# Altium PCB Moisture.PcbDoc
Units mm, origin at the board's own origin, x right, y up, seen from the top; angles counter-clockwise.
Board outline 23.94 x 64.68 mm, 2 copper layers (Top Layer, Bottom Layer); 8 components, 6 nets, 16 pads, 64 vias.
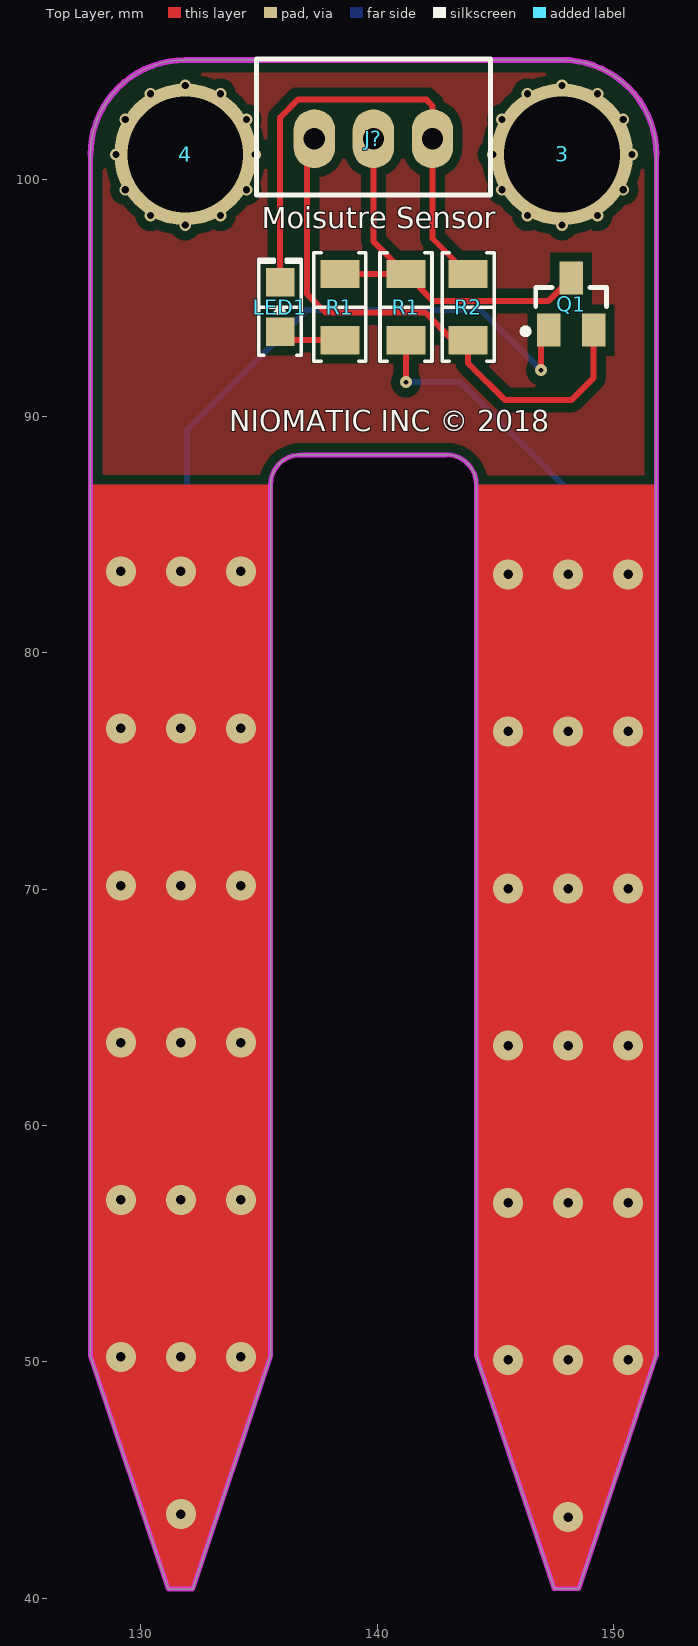
[diagram p0: Top Layer view]
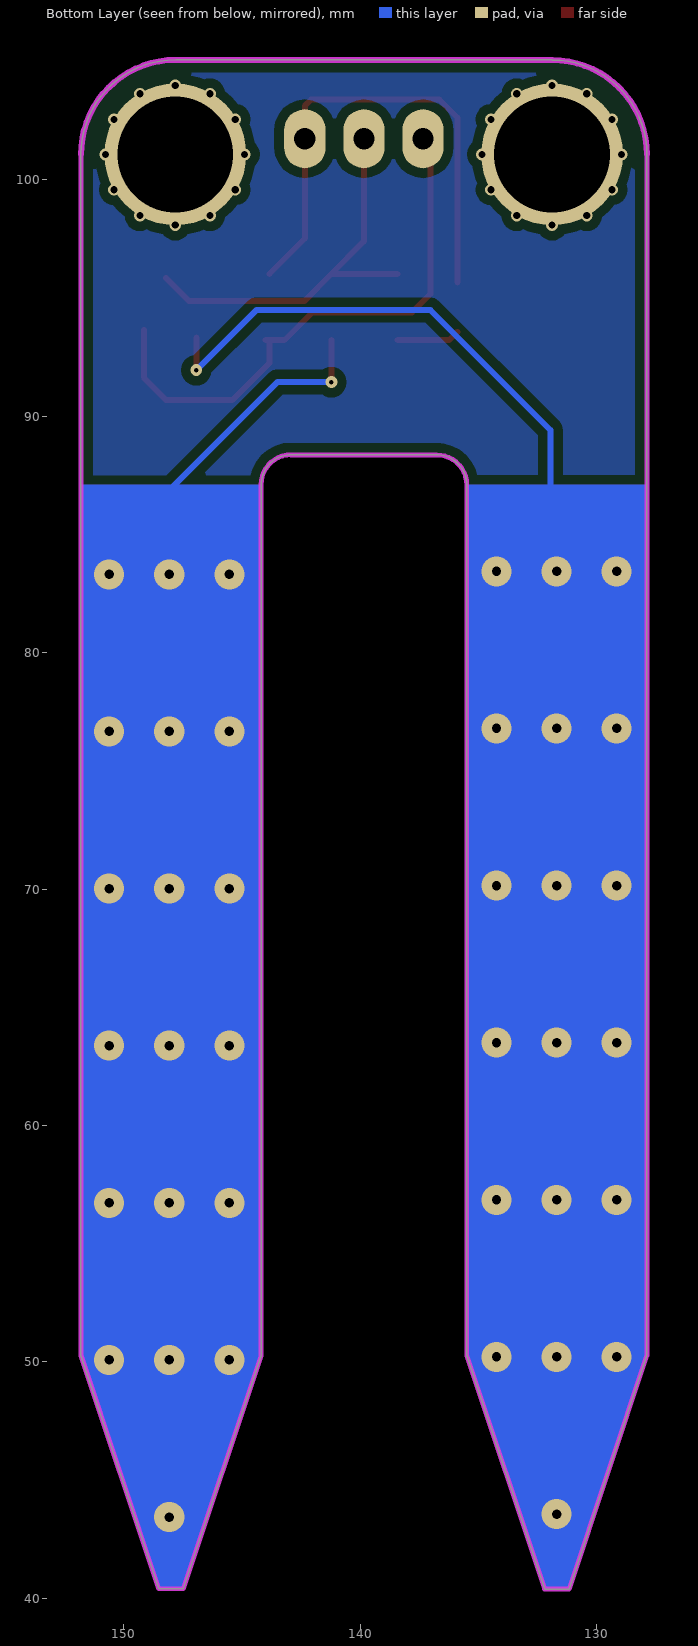
[diagram p1: Bottom Layer view, seen from below]
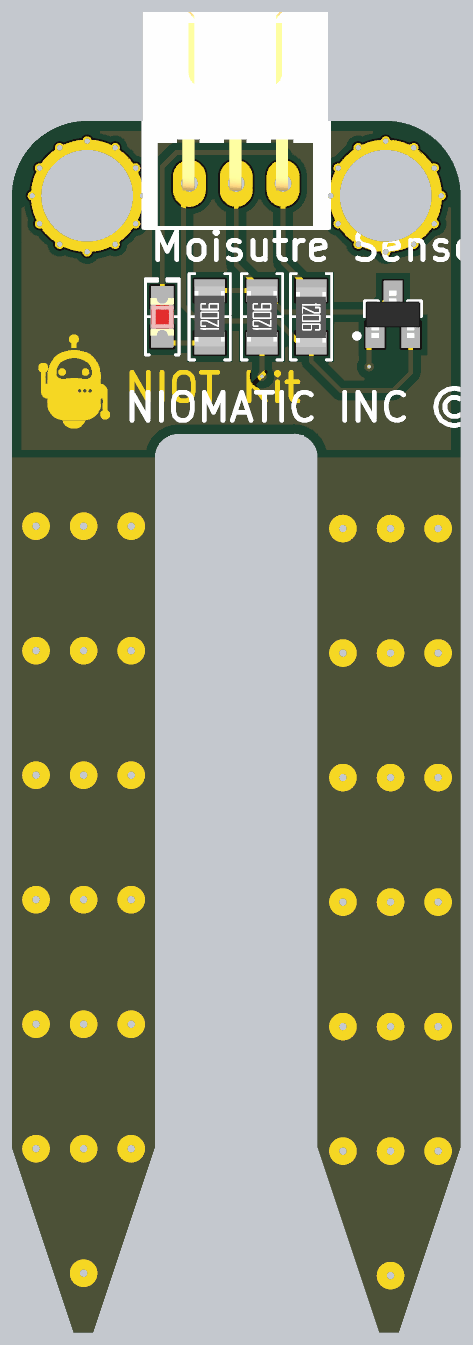
[diagram p2: 3D render of the assembled board from above, using the file's embedded part models]

## Layer stack, top to bottom
Top Solder: solder mask 0.0102, Solder Resist, Dk 3.5
Top Layer: signal copper 0.0356
Dielectric 1: dielectric 0.32, FR-4, Dk 4.8
Bottom Layer: signal copper 0.0356
Bottom Solder: solder mask 0.0102, Solder Resist, Dk 3.5

## Board outline
131.168,40.39 127.876,50.265 127.876,101.065 cw(c131.876,101.065) 131.876,105.065 131.876,105.074 147.816,105.074 cw(c147.816,101.074) 151.816,101.074 151.816,50.274 148.525,40.399 147.488,40.399 144.196,50.274 144.196,87.104 ccw(c142.926,87.104) 142.926,88.374 142.926,88.365 136.766,88.365 ccw(c136.766,87.095) 135.496,87.095 135.496,50.265 132.205,40.39

## Design rules (kind name [scope] priority, off if disabled: settings)
Clearance [All] p1: gap=0.4 ignorepadtopadclearanceinfootprint=FALSE
PolygonConnect [All] p1: connectstyle=Relief reliefconductorwidth=0.254 reliefentries=4 polygonreliefangle="90 Angle" airgapwidth=0.254
RoomDefinition Moisture [InComponentClass('Moisture')] p1: confinementstyle=ConfineIn formatcopy=TRUE lockcomponents=FALSE outline 0,0 50.8,0 50.8,25.4 0,25.4
RoutingVias [All] p1: holewidth=0.711 width=1.27 viastyle="Through Hole" minholewidth=0.711 minwidth=1.27 maxholewidth=0.711 maxwidth=1.27
SolderMaskExpansion [All] p1: expansion=0.102
Width [All] p1: maxlimit=0.254 minlimit=0.254 preferedwidth=0.254
30 further rules are at their usual default settings.

## Classes and differential pairs
component class Moisture: J? LED1 Q1 R1 R2

## Components (designator, comment, footprint, x,y, rotation, side; value= is the part's Value field where it differs from the comment)
3 "Lego" "Lego Hole" 147.826,101.075 r90 top
4 "Lego" "Lego Hole" 131.886,101.075 r90 top
J? "Header" "JST XH B3B-XH-A - RIGHT" 139.846,101.736 r180 top
LED1 "RED" "LED 0805/2012 RED" 135.898,94.615 r90 top value=Green
Q1 "2N3904" SOT23 148.209,94.742 r90 top
R1 "1K" "RES 1206/3216" 138.43,94.615 r90 top
R1 "100R" "RES 1206/3216" 141.224,94.615 r90 top value=1K
R2 "10K" "RES 1206/3216" 143.848,94.615 r270 top value=1K

## Footprints (in the part's own frame and the unit in brackets; to place one, negate y for a bottom-side part, rotate by r counter-clockwise, add the part's x,y. Pads: shape width x height; smd on the part's side, far side on the other; paste and mask are expansions set on the pad)
"JST XH B3B-XH-A - RIGHT" [mm]
  oval 1.75x2.5 hole 0.9: 1(-2.5,0) 2(0,0) 3(2.5,0)
  silkscreen extent -4.95,-3.38 4.95,2.38, body extent -4.9,-9.15 5,2.35, height 6.1
"LED 0805/2012 RED" [mm] "Chip Diode, 2-Leads, Body 2.00x1.25mm, IPC Medium Density"
  rect 1.2x1.2 smd: 1(-1.05,0) 2(1.05,0)
  silkscreen extent -2.03,-0.9 2.03,0.9, body extent -1,-0.62 1,0.63, height 0.9
"Lego Hole" [mm]
  round 6 hole 4.9: 0(0,0)
"RES 1206/3216" [mm] "Chip Resistor, 2-Leads, Body 3.13x1.55mm, IPC Medium Density"
  rect 1.2x1.65 smd: 1(-1.4,0) 2(1.4,0)
  silkscreen extent -2.3,-1.1 2.3,1.1, body extent -1.57,-0.8 1.62,0.8, height 0.6
SOT23 [mm]
  rect 1.4x1 smd: B(-1.1,0.95) C(1.1,0) E(-1.1,-0.95)
  silkscreen extent -1.27,-1.5 0.7,2.05, body extent -1.27,-1.46 1.27,1.46, height 1

## Part data
J?: library part "3 Pin"
LED1: library part LED, "Chip LED"
Q1: library part 2N2222, "NPN", De="Seyed Mohsen Ghasemian", E-mail=picpars@gmail.com, web=www.picpars.com
R1 R1 R2: library part Resistor, "SMT Resistor"

## Via types
v1: diameter 1.27, hole 0.4, Top Layer to Bottom Layer, 38 vias
v2: diameter 0.5, hole 0.3, Top Layer to Bottom Layer, 24 vias
v3: diameter 0.5, hole 0.2, Top Layer to Bottom Layer, tented both sides, 2 vias

## Nets (pads, with @x,y where several pads share a name; then routed paths per layer and width w, separated by ;. In a path a pad name is that pad's centre, name@x,y a point inside that pad or via, vN(x,y) a via of type N, cw(c..) or ccw(c..) an arc to the next point about the centre after c; other vN are vias at no path point)
GND: J?.1 LED1.2 R2.1 | length 21.6
  Top Layer w0.254: LED1.2 135.898,102.633 136.652,103.386 142.084,103.386 142.346,103.124 J?.1 142.346,97.517 R2.1
NetLED1_1: LED1.1 R1.1@138.43,93.215 | length 2.7
  Top Layer w0.254: LED1.1 136.248,93.215 R1.1@138.43,93.215
PROBE1: Q1.B | length 22.7
  Top Layer w0.254: v3(146.939,91.948) Q1.B@146.939,93.322
  Bottom Layer w0.254: 131.953,86.233 131.953,89.408 137.033,94.488 144.399,94.488 v3(146.939,91.948)
  other v1: 131.699,43.561 129.159,50.207 131.699,50.207 134.239,50.207 129.159,56.854 131.699,56.854 134.239,56.854 129.159,63.5 131.699,63.5 134.239,63.5 129.159,70.146 131.699,70.146 134.239,70.146 129.159,76.793 131.699,76.793 134.239,76.793 129.159,83.439 131.699,83.439 134.239,83.439
PROBE2: R1.1@141.224,93.215 | length 12.4
  Top Layer w0.254: v3(141.224,91.44) R1.1@141.224,93.215
  Bottom Layer w0.254: v3(141.224,91.44) 143.51,91.44 148.844,86.106 148.844,85.344
  other v1: 148.082,43.434 145.542,50.08 148.082,50.08 150.622,50.08 145.542,56.727 148.082,56.727 150.622,56.727 145.542,63.373 148.082,63.373 150.622,63.373 145.542,70.019 148.082,70.019 150.622,70.019 145.542,76.666 148.082,76.666 150.622,76.666 145.542,83.312 148.082,83.312 150.622,83.312
SIG: J?.3 Q1.E R2.2 | length 23.8
  Top Layer w0.254: J?.3 137.033,101.423 137.033,95.174 137.82,94.386 142.037,94.386 143.205,93.218 R2.2@144.018,93.218 ; R2.2 143.848,92.245 145.415,90.678 148.209,90.678 149.159,91.628 Q1.E
VCC: J?.2 Q1.C R1.2 | length 16.9
  Top Layer w0.254: R1.2@138.43,96.015 R1.2@141.224,96.015 ; J?.2 139.846,97.393 R1.2@141.224,96.015 ; Q1.C 147.236,94.869 142.37,94.869 R1.2@141.224,96.015
pads on no net: 3.0 4.0
copper on no net:
  other v2: 131.886,98.086 147.826,98.086 130.421,98.486 133.381,98.486 146.361,98.486 149.321,98.486 129.349,99.58 134.475,99.58 145.289,99.58 150.415,99.58 128.956,101.075 134.846,101.075 144.896,101.075 150.786,101.075 129.349,102.555 134.475,102.555 145.289,102.555 150.415,102.555 130.421,103.639 133.381,103.639 146.361,103.639 149.321,103.639 131.886,103.996 147.826,103.996

## Polygon pours and split planes (outlines as drawn)
no net on Top Layer "Top Layer-No Net" (solid, pour order 1): 131.168,40.39 127.876,50.265 127.876,101.065 cw(c131.876,101.065) 131.876,105.065 131.876,105.074 147.816,105.074 cw(c147.816,101.074) 151.816,101.074 151.816,50.274 148.525,40.399 147.488,40.399 144.196,50.274 144.196,87.104 ccw(c142.926,87.104) 142.926,88.374 142.926,88.365 136.766,88.365 ccw(c136.766,87.095) 135.496,87.095 135.496,50.265 132.205,40.39
no net on Bottom Layer "Top Layer-No Net1" (solid, pour order 2): 131.168,40.39 127.876,50.265 127.876,101.065 cw(c131.876,101.065) 131.876,105.065 131.876,105.074 147.816,105.074 cw(c147.816,101.074) 151.816,101.074 151.816,50.274 148.525,40.399 147.488,40.399 144.196,50.274 144.196,87.104 ccw(c142.926,87.104) 142.926,88.374 142.926,88.365 136.766,88.365 ccw(c136.766,87.095) 135.496,87.095 135.496,50.265 132.205,40.39

## Keep-outs
Keep-Out Layer:
  lines w0.203: 127.876,101.065 127.876,50.265 131.168,40.39 132.205,40.39 135.496,50.265 135.496,87.095 cw(c136.766,87.095) 136.766,88.365 142.926,88.365 ; 142.926,88.374 cw(c142.926,87.104) 144.196,87.104 144.196,50.274 147.488,40.399 148.525,40.399 151.816,50.274 151.816,101.074
  lines w0.254: 127.876,101.065 cw(c131.876,101.065) 131.876,105.065 ; 131.876,105.074 147.816,105.074 cw(c147.816,101.074) 151.816,101.074

## Other copper
Top Layer:
  region net PROBE2: 144.196,87.104 144.196,50.274 147.488,40.399 148.525,40.399 151.816,50.274 151.816,87.104
  region net PROBE1: 127.876,87.11 127.876,50.28 131.168,40.405 132.205,40.405 135.496,50.28 135.496,87.11
  region: 143.785,56.55
  region: 127.475,56.82
Bottom Layer:
  region net PROBE1: 127.876,87.11 127.876,50.28 131.168,40.405 132.205,40.405 135.496,50.28 135.496,87.11
  region net PROBE2: 144.196,87.104 144.196,50.274 147.488,40.399 148.525,40.399 151.816,50.274 151.816,87.104

## Silkscreen, mask and mechanical layers (free items; w line width, h text height)
Top Overlay:
  text "Moisutre Sensor" at 135.128,97.663 h1.52
  text "NIOMATIC INC © 2018" at 133.754,89.076 h1.5
Top Solder:
  drawing of 381 lines, arcs and shapes, not listed
  text "NIOT Kit" at 133.754,90.116 h1.52